# EAGLE board board (EAGLE 9.7.0)
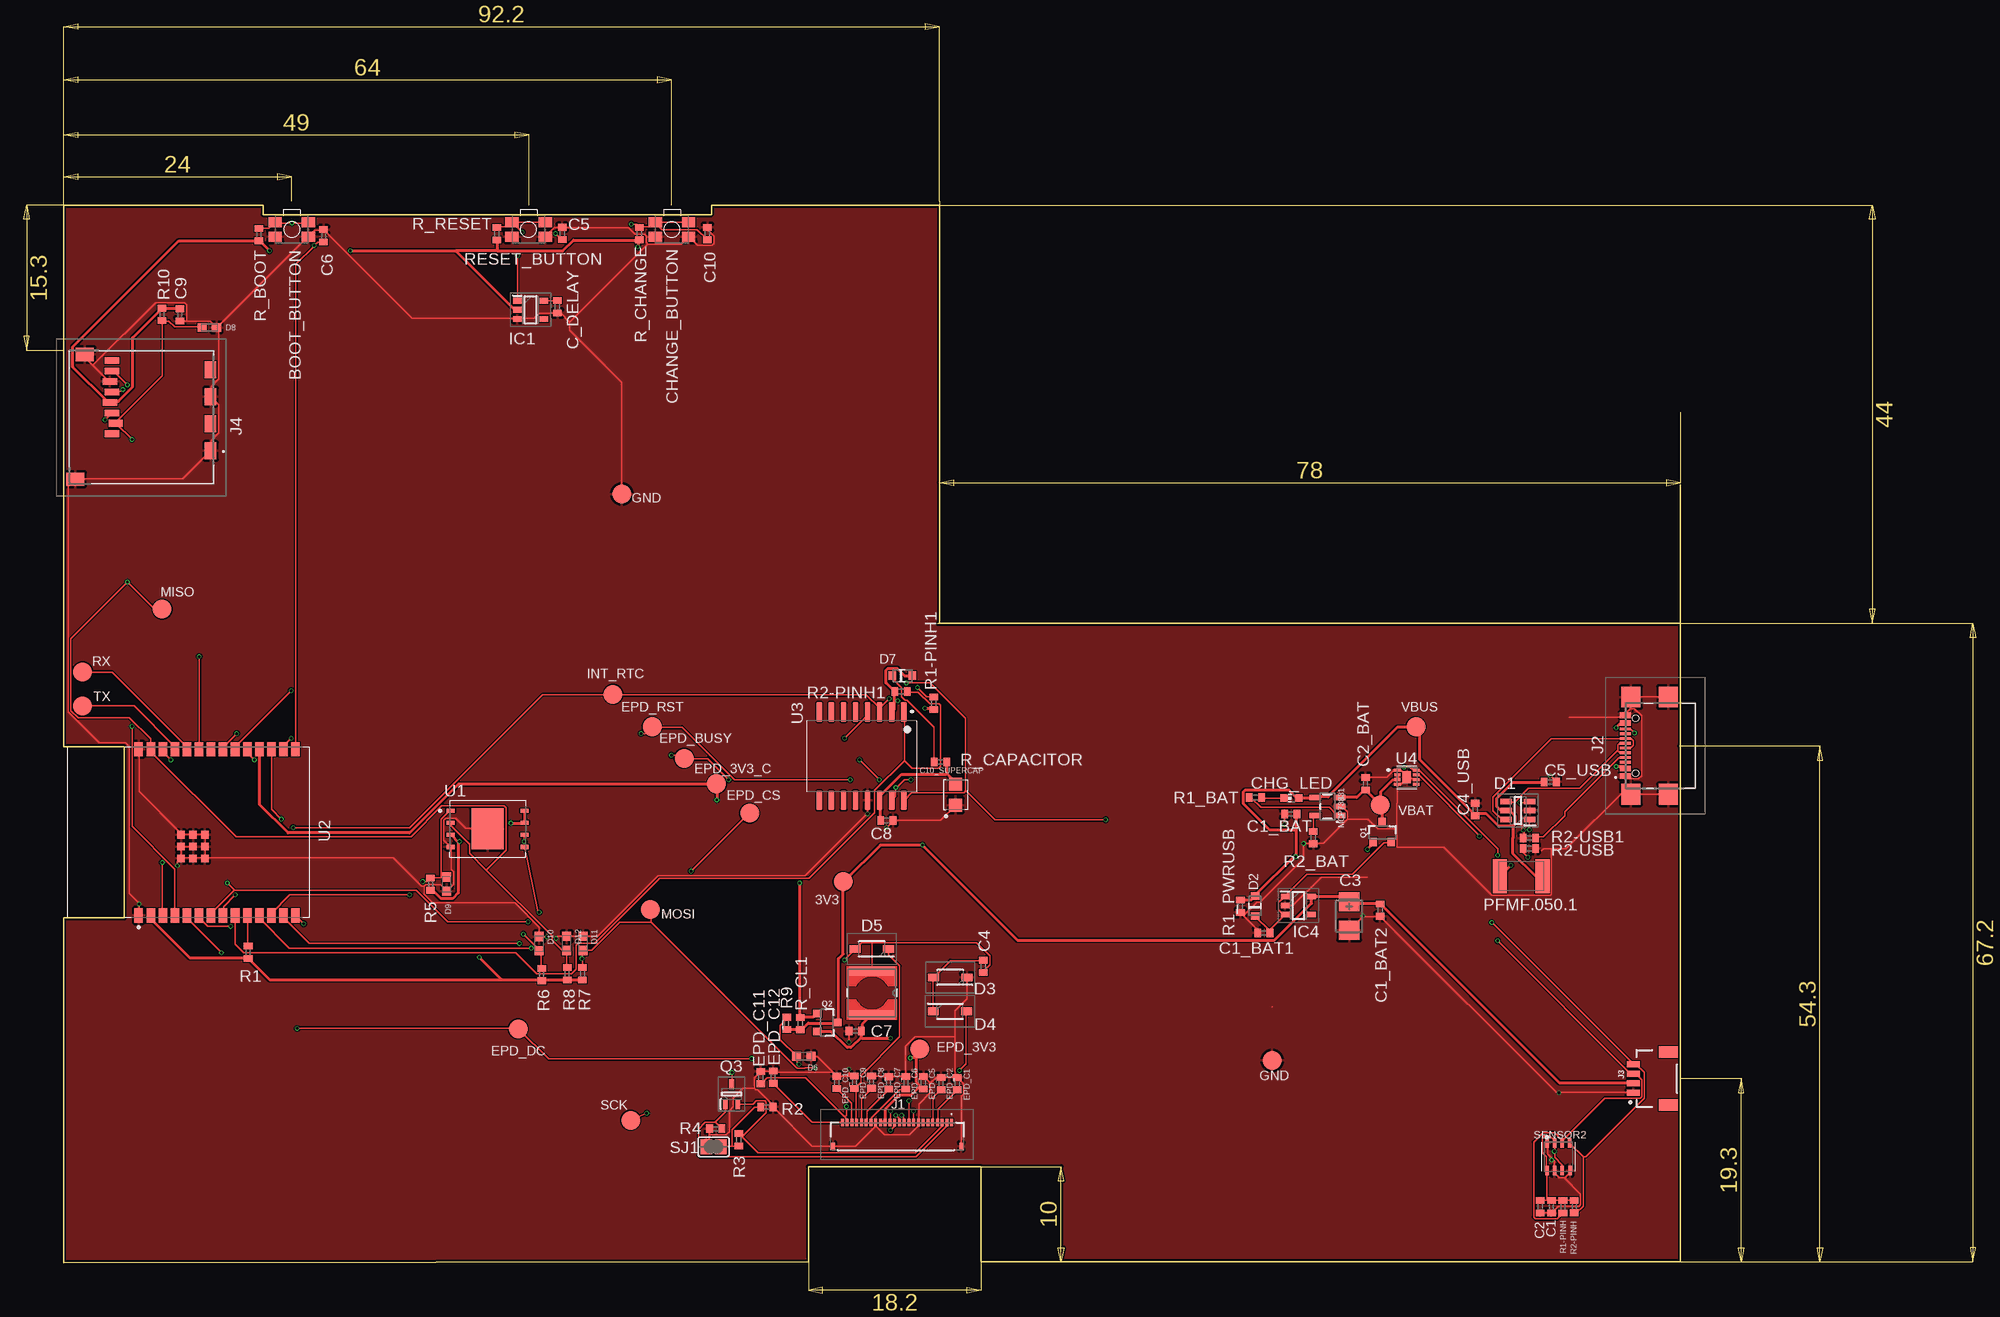
[diagram p0: board, top side]
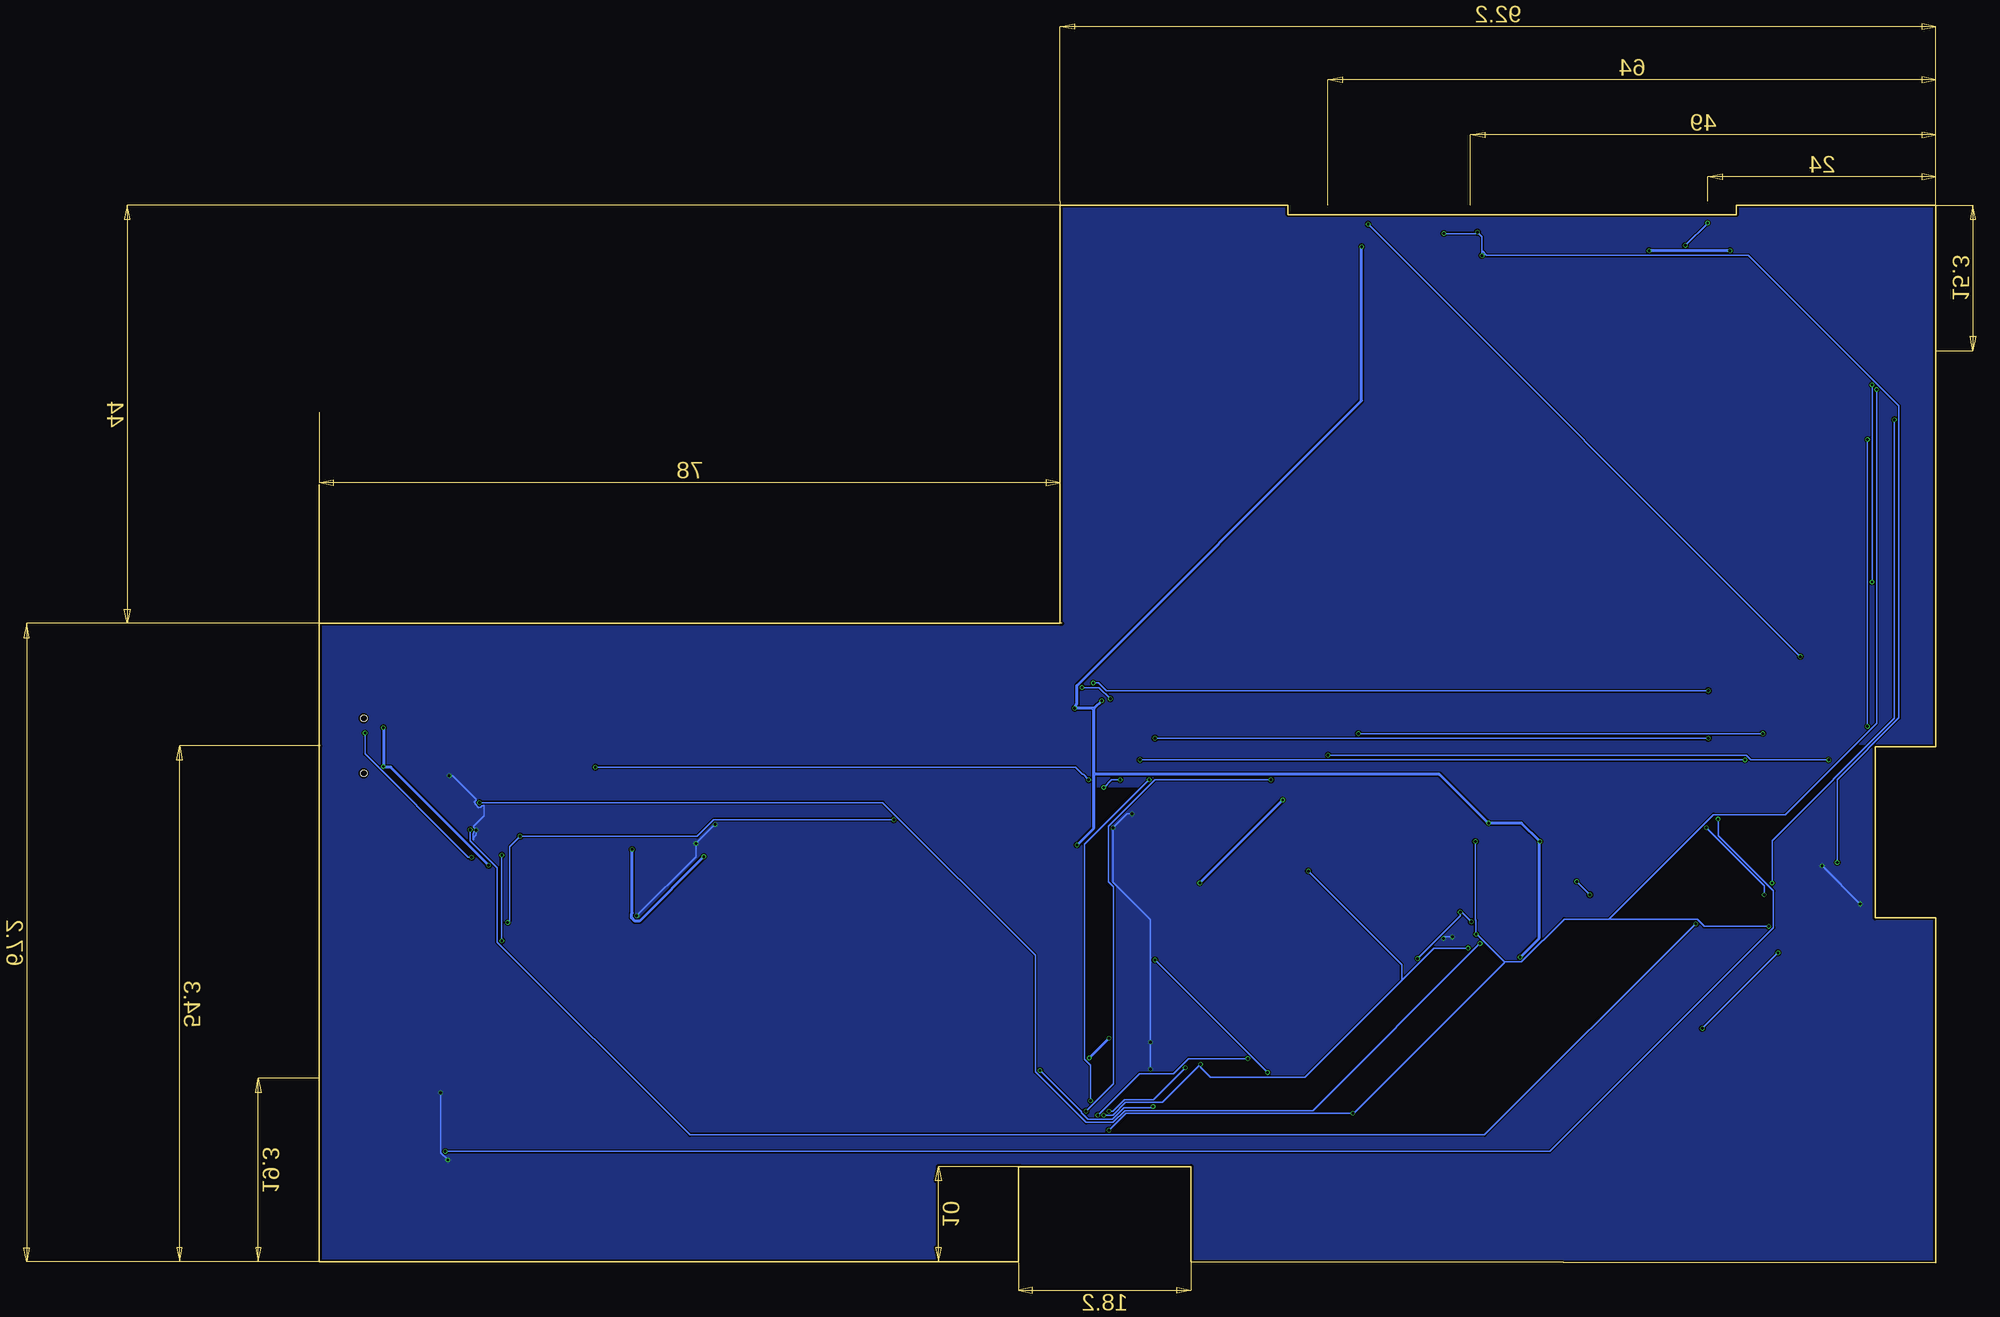
[diagram p1: board, bottom side, seen from below]

Size 170.2 x 111.3 mm. Coordinates in mm from the lower left corner, seen from the top.
Outline: 170.2,81.9 170.2,67.3
Outline: 170.2,67.3 92.2,67.3 92.2,111.3 68.2,111.3 68.2,110.3 21,110.3 21,111.3 0,111.3 0,54.3 6.4,54.3 6.4,36.3 0,36.3 0,0 78.4,0.1 78.4,10.1 96.6,10.1 96.6,0.1 170.2,0.1 170.2,67.3
Copper layers (1*16): Top 0.035mm / dielectric 1.6mm / Bottom 0.035mm
Design rules "jlcpcb-2layers.dru *": minimum track width 0.15mm, minimum drill 0.3mm, track to track 5mil, track to pad 5mil, pad to pad 5mil, via to via 5mil, smd to smd 5mil, copper to edge 0.2mm, drill to drill 6mil, minimum pad ring 10mil, minimum via ring 3mil, stop-mask expansion 4mil, vias tented up to drill 0mil, thermal gap 10mil
Net classes: 1 signals: width 0.3 mm

## Footprints (pad centres in the part's own frame; a part is rotated, then mirrored left to right if it is on the bottom)
MYBUTTON = smd 1.4 x 1.05: 1 1.75,0.75; 2 -1.75,0.75; 3 -1.75,-0.75; 4 1.75,-0.75
ESP32_WROVER_EAGLE-LTSPICE_C0402 = smd 0.7 x 0.9: 1 -0.65,0; 2 0.65,0
RCL_CT3528 = smd 2 x 2.2: + -1.5,0; - 1.5,0
CAPCP3225X100N = smd 1.4 x 1.4: 1 -1.1,0; 2 1.1,0
ADAFRUIT_CHIP-LED0603 = smd 0.8 x 0.8: A 0,-0.75; C 0,0.75
SOT95P280X145-6N = smd 1.2 x 0.6: 1 -1.25,0.95; 2 -1.25,0; 3 -1.25,-0.95; 4 1.25,-0.95; 5 1.25,0; 6 1.25,0.95
ESP32_WROVER_AVX---SD0805S020S1R0_AVX_SD0805S020S1R0_0 = smd 0.8 x 0.9: 1 -1.05,0; 2 1.05,0
SOD3716X135N = smd 1.15 x 0.8: 1 -1.75,0; 2 1.75,0
DIOC1608X36N = smd 0.97 x 0.94: 1 -0.75,0; 2 0.75,0
SOT95P280X125-5N = smd 0.9 x 0.6: 1 -1.4,0.95; 2 -1.4,0; 3 -1.4,-0.95; 4 1.4,-0.95; 5 1.4,0.95
SOT95P280X120-5N = smd 0.9 x 0.6: 1 -1.4,0.95; 2 -1.4,0; 3 -1.4,-0.95; 4 1.4,-0.95; 5 1.4,0.95
FH34SRJ24S05SH99 = smd 0.3 x 0.8: 1 5.75,1.45; 2 5.25,1.45; 3 4.75,1.45; 4 4.25,1.45; 5 3.75,1.45; 6 3.25,1.45; 7 2.75,1.45; 8 2.25,1.45; 9 1.75,1.45; 10 1.25,1.45; 11 0.75,1.45; 12 0.25,1.45; 13 -0.25,1.45; 14 -0.75,1.45; 15 -1.25,1.45; 16 -1.75,1.45; 17 -2.25,1.45; 18 -2.75,1.45; 19 -3.25,1.45; 20 -3.75,1.45; 21 -4.25,1.45; 22 -4.75,1.45; 23 -5.25,1.45; 24 -5.75,1.45 | smd 0.4 x 0.8: MP1 6.75,-1.05; MP2 -6.75,-1.05
SAMACSYS_PARTS_USB4110GFA = smd 0.3 x 1.15: A1 -3.35,3.678; A4 -2.55,3.678; A5 -1.25,3.678; A6 -0.25,3.678; A7 0.25,3.678; A8 1.25,3.678; A9 2.55,3.678; A12 3.35,3.678; B1 3.05,3.678; B4 2.25,3.678; B5 1.75,3.678; B6 0.75,3.678; B7 -0.75,3.678; B8 -1.75,3.678; B9 -2.25,3.678; B12 -3.05,3.678 | smd 2.18 x 2: MP1 -5.11,-0.827; MP2 5.11,-0.827; MP3 -5.11,3.103; MP4 5.11,3.103 | hole 0.65: -2.89,2.603; 2.89,2.603
JST04_1MM_RA = smd 0.6 x 1.35: 1 -1.5,0; 2 -0.5,0; 3 0.5,0; 4 1.5,0 | smd 1.2 x 2: NC1 2.8,-3.675; NC2 -2.8,-3.675
112ATAARR03ATTEND = smd 1.8 x 1.2: G1 10.6,10.4; G2 4.9,10.4; S1 7.75,10.4; S2 2.05,10.4 | smd 1.4 x 1.9: G3 13.6,-3.85; G4 0.45,-2.85 | smd 0.7 x 1.5: P1 8.8,0; P2 7.7,0.4; P3 6.6,0; P4 5.5,-0.2; P5 4.4,0; P6 3.3,-0.2; P7 2.2,0; P8 1.1,0
IND_4828-WE-TPC_WRE = smd 0.958 x 4.84: 1 -2.286,0; 2 2.286,0
ESP32_WROVER_SPARKFUN-IC-POWER_SOT23-5 = smd 0.55 x 1.2: 1 -0.95,-1.3; 2 0,-1.3; 3 0.95,-1.3; 4 0.95,1.3; 5 -0.95,1.3
ESP32C6_VARISTOR_CT/CN1812 = smd 1.5 x 3.6: 1 -2.25,0; 2 2.25,0
ESP32_WROVER_SPARKFUN-DISCRETESEMI_SOT23-3 = smd 0.8 x 0.9: 1 -0.95,-1; 2 0.95,-1; 3 0,1.1
SOT65P210X110-3N = smd 1.05 x 0.5: 1 -1.05,0.65; 2 -1.05,-0.65; 3 1.05,0
ESP32_WROVER_EAGLE-LTSPICE_R0402 = smd 0.7 x 0.9: 1 -0.65,0; 2 0.65,0
ESP32_WROVER_BME680_PSON80P300X300X100-8N = smd 1.016 x 0.5: 1 1.458,1.2; 2 1.458,0.4; 3 1.458,-0.4; 4 1.458,-1.2; 5 -1.458,-1.22; 6 -1.458,-0.4; 7 -1.458,0.4; 8 -1.458,1.2
SJ = smd 1.168 x 1.6: 1 -0.762,0; 2 0.762,0
TP20R = smd 2 x 2: TP 0,0
SON127P600X800X80-9N = smd 0.94 x 0.44: 1 -3.895,1.905; 2 -3.895,0.635; 3 -3.895,-0.635; 4 -3.895,-1.905; 5 3.895,-1.905; 6 3.895,-0.635; 7 3.895,0.635; 8 3.895,1.905 | smd 3.4 x 4.3: 9 0,0
XCVR_ESP32-C6-WROOM-1-N8 = smd 1.5 x 0.9: 1 -8.75,5.26; 2 -8.75,3.99; 3 -8.75,2.72; 4 -8.75,1.45; 5 -8.75,0.18; 6 -8.75,-1.09; 7 -8.75,-2.36; 8 -8.75,-3.63; 9 -8.75,-4.9; 10 -8.75,-6.17; 11 -8.75,-7.44; 12 -8.75,-8.71; 13 -8.75,-9.98; 14 -8.75,-11.25; 15 8.75,-11.25; 16 8.75,-9.98; 17 8.75,-8.71; 18 8.75,-7.44; 19 8.75,-6.17; 20 8.75,-4.9; 21 8.75,-3.63; 22 8.75,-2.36; 23 8.75,-1.09; 24 8.75,0.18; 25 8.75,1.45; 26 8.75,2.72; 27 8.75,3.99; 28 8.75,5.26 | smd 0.8 x 0.8: 29_1 -2.755,0.79; 29_2 -1.505,0.79; 29_3 -0.255,0.79; 29_4 -2.755,-0.46; 29_5 -1.505,-0.46; 29_6 -0.255,-0.46; 29_7 -2.755,-1.71; 29_8 -1.505,-1.71; 29_9 -0.255,-1.71
SOIC127P1032X265-16N = smd 2.05 x 0.59: 1 -4.655,4.445; 2 -4.655,3.175; 3 -4.655,1.905; 4 -4.655,0.635; 5 -4.655,-0.635; 6 -4.655,-1.905; 7 -4.655,-3.175; 8 -4.655,-4.445; 9 4.655,-4.445; 10 4.655,-3.175; 11 4.655,-1.905; 12 4.655,-0.635; 13 4.655,0.635; 14 4.655,1.905; 15 4.655,3.175; 16 4.655,4.445
SON50P200X200X80-9N = smd 0.76 x 0.27: 1 -0.985,0.75; 4 -0.985,-0.75; 5 0.985,-0.75; 6 0.985,-0.25; 7 0.985,0.25; 8 0.985,0.75 | smd 0.76 x 0.321: 2 -0.985,0.25; 3 -0.985,-0.25 | smd 0.9 x 1.3: 9 0,0

## Placement (x,y rotation side)
BOOT_BUTTON  BUTTON_CUSYOMV1  [MYBUTTON]  24.01,108.75 180 top
C1  100nF  [ESP32_WROVER_EAGLE-LTSPICE_C0402]  156.63,5.88 270 top
C1_BAT  4.7uF  [ESP32_WROVER_EAGLE-LTSPICE_C0402]  129.19,47.25 180 top
C1_BAT1  4.7uF  [ESP32_WROVER_EAGLE-LTSPICE_C0402]  126.35,34.71 180 top
C1_BAT2  4.7uF  [ESP32_WROVER_EAGLE-LTSPICE_C0402]  138.59,37.11 270 top
C2  100nF  [ESP32_WROVER_EAGLE-LTSPICE_C0402]  155.43,5.9 270 top
C2_BAT  4.7uF  [ESP32_WROVER_EAGLE-LTSPICE_C0402]  137.05,50.42 90 top
C3  100uF TANT  [RCL_CT3528]  135.34,36.49 270 top
C4  4.7uF/25V  [ESP32_WROVER_EAGLE-LTSPICE_C0402]  96.81,31.18 270 top
C4_USB  100nF  [ESP32_WROVER_EAGLE-LTSPICE_C0402]  148.6,47.7 90 top
C5  1uF  [ESP32_WROVER_EAGLE-LTSPICE_C0402]  52.49,108.33 90 top
C5_USB  100nF  [ESP32_WROVER_EAGLE-LTSPICE_C0402]  156.5,50.6 0 top
C6  100nF  [ESP32_WROVER_EAGLE-LTSPICE_C0402]  27.37,108.08 90 top
C7  10uF  [ESP32_WROVER_EAGLE-LTSPICE_C0402]  83.33,24.37 180 top
C8  100nF  [ESP32_WROVER_EAGLE-LTSPICE_C0402]  86.66,46.53 0 top
C9  100nF  [ESP32_WROVER_EAGLE-LTSPICE_C0402]  12.23,99.76 270 top
C10  100nF  [ESP32_WROVER_EAGLE-LTSPICE_C0402]  67.77,108.32 90 top
C10_SUPERCAP  CPH3225A  [CAPCP3225X100N]  93.89,49.25 90 top
C_DELAY  100nF  [ESP32_WROVER_EAGLE-LTSPICE_C0402]  51.99,100.61 270 top
CHANGE_BUTTON  BUTTON_CUSYOMV1  [MYBUTTON]  64.04,108.75 180 top
CHG_LED  [ADAFRUIT_CHIP-LED0603]  129.25,48.89 90 top
D1  USBLC6-2SC6Y  [SOT95P280X145-6N]  153.1,47.6 180 top
D2  ESP32_WROVER_AVX---SD0805S020S1R0_AVX_SD0805S020S1R0_0_0AVX_SD0805S020S1R0_0_0  [ESP32_WROVER_AVX---SD0805S020S1R0_AVX_SD0805S020S1R0_0]  125.42,37.55 90 top
D3  MBR0530  [SOD3716X135N]  93.34,30.03 180 top
D4  MBR0530  [SOD3716X135N]  93.3,26.47 0 top
D5  MBR0530  [SOD3716X135N]  85.08,33.02 180 top
D6  PGB1010603MR  [DIOC1608X36N]  77.92,21.73 180 top
D7  ESP32_WROVER_AVX---SD0805S020S1R0_AVX_SD0805S020S1R0_0_0AVX_SD0805S020S1R0_0_0  [ESP32_WROVER_AVX---SD0805S020S1R0_AVX_SD0805S020S1R0_0]  88.3,61.78 0 top
D8  PGB1010603MR  [DIOC1608X36N]  15.34,98.43 180 top
D9  PGB1010603MR  [DIOC1608X36N]  40.33,39.84 90 top
D10  PGB1010603MR  [DIOC1608X36N]  50.07,33.58 270 top
D11  PGB1010603MR  [DIOC1608X36N]  54.67,33.6 270 top
D12  PGB1010603MR  [DIOC1608X36N]  52.97,33.62 270 top
EPD_C1  1uF/50V  [ESP32_WROVER_EAGLE-LTSPICE_C0402]  94.07,18.86 270 top
EPD_C2  1uF/50V  [ESP32_WROVER_EAGLE-LTSPICE_C0402]  92.37,18.85 270 top
EPD_C5  0.1uF/50V  [ESP32_WROVER_EAGLE-LTSPICE_C0402]  90.51,18.94 270 top
EPD_C6  1uF/50V  [ESP32_WROVER_EAGLE-LTSPICE_C0402]  88.67,18.94 270 top
EPD_C7  1uF/50V  [ESP32_WROVER_EAGLE-LTSPICE_C0402]  86.85,18.92 270 top
EPD_C8  1uF/50V  [ESP32_WROVER_EAGLE-LTSPICE_C0402]  85.05,19.01 270 top
EPD_C9  1uF/50V  [ESP32_WROVER_EAGLE-LTSPICE_C0402]  83.25,19 270 top
EPD_C10  1uF/50V  [ESP32_WROVER_EAGLE-LTSPICE_C0402]  81.39,18.97 270 top
EPD_C11  1uF/50V  [ESP32_WROVER_EAGLE-LTSPICE_C0402]  73.39,19.49 270 top
EPD_C12  1uF/50V  [ESP32_WROVER_EAGLE-LTSPICE_C0402]  74.69,19.53 270 top
IC1  BD5229G-TR  [SOT95P280X125-5N]  49.15,100.29 0 top
IC4  XC6220A331MR-G  [SOT95P280X120-5N]  129.99,37.59 0 top
J1  FH34SRJ-24S-0.5SH_99_  [FH34SRJ24S05SH99]  87.74,13.29 0 top
J2  [SAMACSYS_PARTS_USB4110GFA]  168.1,54.42 90 top
J3  QWIIC_RIGHT_ANGLE  [JST04_1MM_RA]  165.25,19.38 90 top
J4  112A-TAAR-R03_ATTEND  [112ATAARR03ATTEND]  5.08,96.05 270 top
L1  744043680IND_4828-WE-TPC_WRE  [IND_4828-WE-TPC_WRE]  85.1,28.4 270 top
MCP73831  ESP32_WROVER_SPARKFUN-IC-POWER_MCP73831  [ESP32_WROVER_SPARKFUN-IC-POWER_SOT23-5]  133.04,48.01 90 top
PFMF.050.1  [ESP32C6_VARISTOR_CT/CN1812]  153.44,40.69 0 top
Q1  20V/4.2A/52mΩ/1.4W  [ESP32_WROVER_SPARKFUN-DISCRETESEMI_SOT23-3]  138.81,45.26 0 top
Q2  20V/4.2A/52mΩ/1.4W  [ESP32_WROVER_SPARKFUN-DISCRETESEMI_SOT23-3]  80.36,25.27 270 top
Q3  SI1308EDL-T1-GE3  [SOT65P210X110-3N]  70.32,17.75 90 top
R1  10K  [ESP32_WROVER_EAGLE-LTSPICE_R0402]  19.43,32.67 270 top
R1-PINH  10K  [ESP32_WROVER_EAGLE-LTSPICE_R0402]  157.83,5.9 90 top
R1-PINH1  10K  [ESP32_WROVER_EAGLE-LTSPICE_R0402]  91.59,58.89 270 top
R1_BAT  200  [ESP32_WROVER_EAGLE-LTSPICE_R0402]  125.47,48.95 180 top
R1_PWRUSB  100K  [ESP32_WROVER_EAGLE-LTSPICE_R0402]  123.89,37.51 90 top
R2  2.2  [ESP32_WROVER_EAGLE-LTSPICE_R0402]  74.03,16.39 180 top
R2-PINH  10K  [ESP32_WROVER_EAGLE-LTSPICE_R0402]  159.03,5.91 90 top
R2-PINH1  10K  [ESP32_WROVER_EAGLE-LTSPICE_R0402]  88.15,60.11 180 top
R2-USB  5k1  [ESP32_WROVER_EAGLE-LTSPICE_R0402]  154.3,43.6 0 top
R2-USB1  5k1  [ESP32_WROVER_EAGLE-LTSPICE_R0402]  154.3,44.7 0 top
R2_BAT  2K  [ESP32_WROVER_EAGLE-LTSPICE_R0402]  131.55,44.74 90 top
R3  0.47  [ESP32_WROVER_EAGLE-LTSPICE_R0402]  71.07,12.94 90 top
R4  10k  [ESP32_WROVER_EAGLE-LTSPICE_R0402]  68.65,14.11 0 top
R5  10K  [ESP32_WROVER_EAGLE-LTSPICE_R0402]  38.63,39.85 270 top
R6  10K  [ESP32_WROVER_EAGLE-LTSPICE_R0402]  50.33,30.33 270 top
R7  10K  [ESP32_WROVER_EAGLE-LTSPICE_R0402]  54.63,30.41 270 top
R8  10K  [ESP32_WROVER_EAGLE-LTSPICE_R0402]  53.01,30.41 270 top
R9  10K  [ESP32_WROVER_EAGLE-LTSPICE_R0402]  76.11,25.19 270 top
R10  10K  [ESP32_WROVER_EAGLE-LTSPICE_R0402]  10.37,99.81 90 top
R_BOOT  10K  [ESP32_WROVER_EAGLE-LTSPICE_R0402]  20.57,108.21 270 top
R_CAPACITOR  15  [ESP32_WROVER_EAGLE-LTSPICE_R0402]  92.31,52.71 0 top
R_CHANGE  10K  [ESP32_WROVER_EAGLE-LTSPICE_R0402]  60.61,108.32 270 top
R_CL1  10K  [ESP32_WROVER_EAGLE-LTSPICE_R0402]  77.55,25.17 270 top
R_RESET  10K  [ESP32_WROVER_EAGLE-LTSPICE_R0402]  45.61,108.3 270 top
RESET_BUTTON  BUTTON_CUSYOMV1  [MYBUTTON]  48.95,108.75 180 top
SENSOR2  ESP32_WROVER_BME680_BME680  [ESP32_WROVER_BME680_PSON80P300X300X100-8N]  157.36,11.15 90 top
SJ1  [SJ]  68.42,12.19 0 top
TP1  TPTP20R  [TP20R]  1.99,58.61 0 top
TP2  TPTP20R  [TP20R]  1.99,62.19 0 top
TP3  TPTP20R  [TP20R]  138.61,48.19 0 top
TP4  TPTP20R  [TP20R]  127.23,21.29 0 top
TP5  TPTP20R  [TP20R]  58.75,80.89 0 top
TP6  TPTP20R  [TP20R]  10.37,68.79 0 top
TP7  TPTP20R  [TP20R]  61.79,37.19 0 top
TP8  TPTP20R  [TP20R]  59.71,14.99 0 top
TP9  TPTP20R  [TP20R]  65.33,53.09 0 top
TP10  TPTP20R  [TP20R]  72.22,47.31 0 top
TP11  TPTP20R  [TP20R]  47.87,24.61 0 top
TP12  TPTP20R  [TP20R]  61.97,56.41 0 top
TP13  TPTP20R  [TP20R]  68.72,50.41 0 top
TP14  TPTP20R  [TP20R]  142.37,56.41 0 top
TP15  TPTP20R  [TP20R]  57.82,59.81 0 top
TP16  TPTP20R  [TP20R]  82.07,40.11 0 top
TP17  TPTP20R  [TP20R]  90.12,22.51 0 top
U1  W25Q512JVEIQ  [SON127P600X800X80-9N]  44.64,45.66 0 top
U2  ESP32-C6-WROOM-1-N8  [XCVR_ESP32-C6-WROOM-1-N8]  13.16,45.3 90 top
U3  DS3231SN#  [SOIC127P1032X265-16N]  84,53.31 270 top
U4  MAX17048G+T10  [SON50P200X200X80-9N]  141.4,51.1 0 top

## Library data of the parts
BOOT_BUTTON CHANGE_BUTTON CHG_LED PFMF.050.1 RESET_BUTTON SJ1 TP1-TP17 = DeskAssistant v19 v1
C1 C1_BAT C1_BAT1 C1_BAT2 C2 C2_BAT C4 C4_USB C5 C5_USB C6-C10 C_DELAY EPD_C1 EPD_C2 EPD_C5-EPD_C12 = DeskAssistant v19 v1; SPICEMODEL: NONE; SPICEPREFIX: C
C3 = DeskAssistant v19 v1; SPICEPREFIX: C
C10_SUPERCAP = DeskAssistant v19 v1; AVAILABILITY: Not in stock; CHECK_PRICES: https://www.snapeda.com/parts/CPH3225A/Seiko+Instruments/view-part/?ref=eda; DESCRIPTION: 11 mF (EDLC) Supercapacitor 3.3 V 1210 (3225 Metric) - -; MF: Seiko Instruments; MP: CPH3225A; PACKAGE: 1210 Seiko; PRICE: None; PURCHASE-URL: https://www.snapeda.com/api/url_track_click_mouser/?unipart_id=562593&manufacturer=Seiko Instruments&part_name=CPH3225A&search_term=None; SNAPEDA_LINK: https://www.snapeda.com/parts/CPH3225A/Seiko+Instruments/view-part/?ref=snap
D1 = DeskAssistant v19 v1; AVAILABILITY: In Stock; CHECK_PRICES: https://www.snapeda.com/parts/USBLC6-2SC6Y/STMicroelectronics/view-part/?ref=eda; DESCRIPTION: 17V Clamp 5A (8/20µs) Ipp Tvs Diode Surface Mount SOT-23-6; MF: STMicroelectronics; MP: USBLC6-2SC6Y; PACKAGE: SOT-23-6 STMicroelectronics; PRICE: None; SNAPEDA_LINK: https://www.snapeda.com/parts/USBLC6-2SC6Y/STMicroelectronics/view-part/?ref=snap
D2 D7 = DeskAssistant v19 v1; CENTROID_NOT_SPECIFIED: No; DATASHEET: http://datasheets.avx.com/schottky.pdf; DIGIKEY_DESCRIPTION: DIODE SCHOTTKY 20V 1A 0805; DIGIKEY_PART_NUMBER: 478-7800-1-ND; LEAD_FREE: yes; MF: AVX; MOUSER_PART_NUMBER: 581-SD0805S020S1R0; PACKAGE: 0805 (2012 metric); PREFIX: D; ROHS: yes; TEMPERATURE_RANGE_HIGH: +125°C; TEMPERATURE_RANGE_LOW: -55°C
D3-D5 = DeskAssistant v19 v1; AVAILABILITY: In Stock; CHECK_PRICES: https://www.snapeda.com/parts/MBR0530/Onsemi/view-part/?ref=eda; DESCRIPTION: Diode Schottky 30 V 500mA Surface Mount SOD-123; MF: ON Semiconductor; MP: MBR0530; PACKAGE: SOD-123-2 ON Semiconductor; PRICE: None; PURCHASE-URL: https://www.snapeda.com/api/url_track_click_mouser/?unipart_id=179458&manufacturer=ON Semiconductor&part_name=MBR0530&search_term=None; SNAPEDA_LINK: https://www.snapeda.com/parts/MBR0530/Onsemi/view-part/?ref=snap
D6 D8-D12 = DeskAssistant v19 v1; AVAILABILITY: In Stock; CHECK_PRICES: https://www.snapeda.com/parts/PGB1010603MR/Littelfuse/view-part/?ref=eda; DESCRIPTION: 150V (Typ) Clamp - Ipp Tvs Diode Surface Mount 0603 (1608 Metric); MF: Littelfuse Inc.; MP: PGB1010603MR; PACKAGE: 0603 Littelfuse Inc.; PRICE: None; PURCHASE-URL: https://www.snapeda.com/api/url_track_click_mouser/?unipart_id=5659453&manufacturer=Littelfuse Inc.&part_name=PGB1010603MR&search_term=None; SNAPEDA_LINK: https://www.snapeda.com/parts/PGB1010603MR/Littelfuse/view-part/?ref=snap
IC1 = DeskAssistant v19 v1; DESCRIPTION: Voltage Detector with Adjustable Delay Time: CMOS processes are utilized to develop high precision, low current consumption CMOS reset ICs that allow arbitrary setting of the delay time. The extensive lineup includes both Nch Open Drain and CMOS output types in a wide range of detection voltages (from 2.3V to 6.0V, in 0.1V steps), enabling selection of the ideal solution based on customer requirements. In addition, the entire series is of course both lead-free and RoHS-compliant.; HEIGHT: 1.25mm; MANUFACTURER_NAME: ROHM Semiconductor; MANUFACTURER_PART_NUMBER: BD5229G-TR; MOUSER_PART_NUMBER: 755-BD5229G-TR; MOUSER_PRICE-STOCK: https://www.mouser.co.uk/ProductDetail/ROHM-Semiconductor/BD5229G-TR?qs=4kLU8WoGk0vvnhrrYwdszw%3D%3D
IC4 = DeskAssistant v19 v1; DESCRIPTION: LDO Voltage Regulators; HEIGHT: 1.2mm; MANUFACTURER_NAME: Torex; MANUFACTURER_PART_NUMBER: XC6220A331MR-G; MOUSER_PART_NUMBER: 865-XC6220A331MR-G; MOUSER_PRICE-STOCK: https://www.mouser.co.uk/ProductDetail/Torex-Semiconductor/XC6220A331MR-G?qs=AsjdqWjXhJ8ZSWznL1J0gg%3D%3D
J1 = DeskAssistant v19 v1; DESCRIPTION: 24 Position FFC, FPC Connector Contacts, Top and Bottom 0.020" (0.50mm) Surface Mount, Right Angle; HEIGHT: 1.1mm; MANUFACTURER_NAME: Hirose; MANUFACTURER_PART_NUMBER: FH34SRJ-24S-0.5SH(99); MOUSER_PART_NUMBER: 798-FH34SRJ24S05SH99; MOUSER_PRICE-STOCK: https://www.mouser.co.uk/ProductDetail/Hirose-Connector/FH34SRJ-24S-0.5SH99?qs=vcbW%252B4%252BSTIpKBl5ap9J8Fw%3D%3D
J2 = DeskAssistant v19 v1; DESCRIPTION: CONN USB 2.0 TYPE-C R/A SMT; HEIGHT: 3.26mm; MANUFACTURER_NAME: GCT (GLOBAL CONNECTOR TECHNOLOGY); MANUFACTURER_PART_NUMBER: USB4110-GF-A; MOUSER_PART_NUMBER: 640-USB4110-GF-A; MOUSER_PRICE-STOCK: https://www.mouser.co.uk/ProductDetail/GCT/USB4110-GF-A?qs=KUoIvG%2F9IlYiZvIXQjyJeA%3D%3D
J3 = DeskAssistant v19 v1; PROD_ID: CONN-13694
J4 = DeskAssistant v19 v1; DESCRIPTION: Micro SD Card Socket, Push-Push Type, Top Mount, SMT, H=1.83mm, 10u; HEIGHT: 1.9mm; MANUFACTURER_NAME: ATTEND; MANUFACTURER_PART_NUMBER: 112A-TAAR-R03 ATTEND
L1 = DeskAssistant v19 v1; COPYRIGHT: Copyright (C) 2024 Ultra Librarian. All rights reserved.; MANUFACTURER_PART_NUMBER: 744043680; MFR_NAME: Wurth Electronics; VALUE_V: 68uH
MCP73831 = DeskAssistant v19 v1; PROD_ID: IC-09995
Q1 Q2 = DeskAssistant v19 v1; PROD_ID: TRAN-14388
Q3 = DeskAssistant v19 v1; AVAILABILITY: In Stock; CHECK_PRICES: https://www.snapeda.com/parts/SI1308EDL-T1-GE3/Vishay+Siliconix/view-part/?ref=eda; DESCRIPTION: Si1308EDL-T1-GE3 N-channel MOSFET Transistor, 1.5 A, 30 V, 3-Pin SC-70 | Siliconix / Vishay SI1308EDL-T1-GE3; MF: Vishay Siliconix; MP: SI1308EDL-T1-GE3; PACKAGE: SOT-323 Vishay Semiconductor; PRICE: None; PURCHASE-URL: https://www.snapeda.com/api/url_track_click_mouser/?unipart_id=274603&manufacturer=Vishay Siliconix&part_name=SI1308EDL-T1-GE3&search_term=None; SNAPEDA_LINK: https://www.snapeda.com/parts/SI1308EDL-T1-GE3/Vishay+Siliconix/view-part/?ref=snap
R1 R1-PINH R1-PINH1 R1_BAT R2 R2-PINH R2-PINH1 R2-USB R2-USB1 R2_BAT R3-R10 R_BOOT R_CAPACITOR R_CHANGE R_CL1 R_RESET = DeskAssistant v19 v1; SPICEMODEL: NONE; SPICEPREFIX: R
R1_PWRUSB = DeskAssistant v19 v1; SPICEPREFIX: R
SENSOR2 = DeskAssistant v19 v1; AVAILABILITY: Unavailable; DESCRIPTION: Integrated Environmental Unit; MF: Bosch Sensortec; MP: BME680; PACKAGE: LGA-8 Bosch Tools; PRICE: None
U1 = DeskAssistant v19 v1; AVAILABILITY: In Stock; CHECK_PRICES: https://www.snapeda.com/parts/W25Q512JVEIQ/Winbond+Electronics/view-part/?ref=eda; DESCRIPTION: FLASH - NOR Memory IC 512Mb (64M x 8) SPI - Quad I/O 133 MHz 8-WSON (8x6); MF: Winbond Electronics; MP: W25Q512JVEIQ; PACKAGE: Package; PRICE: None; SNAPEDA_LINK: https://www.snapeda.com/parts/W25Q512JVEIQ/Winbond+Electronics/view-part/?ref=snap
U2 = DeskAssistant v19 v1; AVAILABILITY: In Stock; CHECK_PRICES: https://www.snapeda.com/parts/ESP32-C6-WROOM-1-N8/Espressif+Systems/view-part/?ref=eda; DESCRIPTION: Multiprotocol Modules ESP32-C6 module, Wi-Fi 6 in 2.4 GHz band, Bluetooth 5, Zigbee 3.0 and Thread. ESP34-WROOM Compatible - ENGINEERING SAMPLE; MF: Espressif Systems; MP: ESP32-C6-WROOM-1-N8; PACKAGE: None; PRICE: None; SNAPEDA_LINK: https://www.snapeda.com/parts/ESP32-C6-WROOM-1-N8/Espressif+Systems/view-part/?ref=snap
U3 = DeskAssistant v19 v1; AVAILABILITY: In Stock; CHECK_PRICES: https://www.snapeda.com/parts/DS3231SN%23/Analog+Devices/view-part/?ref=eda; DESCRIPTION: Extremely Accurate I²C-Integrated RTC/TCXO/Crystal; MF: Analog Devices; MP: DS3231SN#; PACKAGE: SOIC-16 Maxim; PRICE: None; PURCHASE-URL: https://www.snapeda.com/api/url_track_click_mouser/?unipart_id=99048&manufacturer=Analog Devices&part_name=DS3231SN#&search_term=None; SNAPEDA_LINK: https://www.snapeda.com/parts/DS3231SN%23/Analog+Devices/view-part/?ref=snap
U4 = DeskAssistant v19 v1; AVAILABILITY: In Stock; CHECK_PRICES: https://www.snapeda.com/parts/MAX17048G+T10/Analog+Devices/view-part/?ref=eda; DESCRIPTION: 3µA 1-Cell/2-Cell Fuel Gauge with ModelGauge; MF: Analog Devices; MP: MAX17048G+T10; PACKAGE: TDFN-8 Maxim; PRICE: None; PURCHASE-URL: https://www.snapeda.com/api/url_track_click_mouser/?unipart_id=329239&manufacturer=Analog Devices&part_name=MAX17048G+T10&search_term=None; SNAPEDA_LINK: https://www.snapeda.com/parts/MAX17048G+T10/Analog+Devices/view-part/?ref=snap

## Nets
3V3 [signals]: C1_BAT2.1 C3.+ C9.1 D7.2 IC1.2 IC4.5 J3.2 J4.P4 Q2.3 R1-PINH1.2 R1.2 R2-PINH1.2 R5.2 R6.2 R7.2 R8.2 R9.2 R10.2 R_BOOT.2 R_CHANGE.2 R_CL1.2 R_RESET.2 TP16.TP U1.3 U1.7 U1.8 U2.2 U3.2
32KHZ: R2-PINH1.1 U2.9 U3.1
DN: D1.4 J2.A7 J2.B7
DP: D1.6 J2.A6 J2.B6
EPD_3V3 [signals]: C7.1 EPD_C5.2 J1.15 J1.16 L1.2 Q2.2 TP17.TP
EPD_3V3_C [signals]: Q2.1 R_CL1.1 TP13.TP U2.18
EPD_BUSY: J1.9 TP9.TP U2.26
EPD_CS: D6.2 J1.12 R9.1 TP10.TP U2.11
EPD_DC: J1.11 TP11.TP U2.5
EPD_RST: J1.10 TP12.TP U2.21
FLASH_CS: D9.2 R5.1 U1.1 U2.12
GDR: J1.2 Q3.1 R4.2
GND: BOOT_BUTTON.1 BOOT_BUTTON.2 C1.2 C1_BAT1.2 C1_BAT2.2 C1_BAT.2 C2.2 C2_BAT.2 C3.- C4_USB.2 C5.2 C5_USB.2 C6.2 C7.2 C8.2 C9.2 C10.2 C10_SUPERCAP.1 C_DELAY.2 CHANGE_BUTTON.1 CHANGE_BUTTON.2 D1.2 D3.1 D6.1 D8.1 D9.1 D10.1 D11.1 D12.1 EPD_C1.1 EPD_C2.1 EPD_C5.1 EPD_C6.1 EPD_C7.1 EPD_C8.1 EPD_C9.1 EPD_C10.1 EPD_C11.1 EPD_C12.1 IC1.3 IC4.2 J1.8 J1.17 J1.MP1 J1.MP2 J2.A1 J2.A12 J2.B1 J2.B12 J2.MP1 J2.MP2 J2.MP3 J2.MP4 J3.1 J4.G1 J4.G2 J4.G3 J4.G4 J4.P6 MCP73831.2 R1_PWRUSB.1 R2-USB1.1 R2-USB.2 R2.1 R2_BAT.1 R4.1 RESET_BUTTON.1 RESET_BUTTON.2 SENSOR2.1 SENSOR2.5 SENSOR2.7 SJ1.1 TP4.TP TP5.TP U1.4 U1.9 U2.1 U2.28 U2.29_1 U2.29_2 U2.29_3 U2.29_4 U2.29_5 U2.29_6 U2.29_7 U2.29_8 U2.29_9 U3.13 U4.1 U4.4 U4.6 U4.9
GPIO8: R1.1 U2.10
I2C_PW: C1.1 C2.1 R1-PINH.2 R2-PINH.2 SENSOR2.2 SENSOR2.6 SENSOR2.8 U2.17
INT_RTC: R1-PINH1.1 TP15.TP U2.8 U3.3
IO/BOOT: BOOT_BUTTON.3 BOOT_BUTTON.4 C6.1 R_BOOT.1 U2.15
IO/CHANGE: C10.1 CHANGE_BUTTON.3 CHANGE_BUTTON.4 R_CHANGE.1 U2.23
MISO: D12.2 J4.P7 R8.1 TP6.TP U1.2 U2.27
MOSI: D11.2 J1.14 J4.P3 R7.1 TP7.TP U1.5 U2.7
N$1: J2.A5 R2-USB1.2
N$4: J2.B5 R2-USB.1
N$6: C1_BAT1.1 D2.1 IC4.1 IC4.3 Q1.2
N$7: MCP73831.5 R2_BAT.2
N$8: EPD_C2.2 J1.5
N$9: EPD_C1.2 J1.4
N$10: CHG_LED.C R1_BAT.1
N$11: MCP73831.1 R1_BAT.2
N$12: EPD_C12.2 J1.24
N$13: C_DELAY.1 IC1.5
N$15: EPD_C10.2 J1.22
N$16: C4.1 D3.2 D4.1
N$18: EPD_C8.2 J1.20
N$19: EPD_C7.2 J1.19
N$20: EPD_C6.2 J1.18
N$25: D7.1 R_CAPACITOR.1
PREVGH: D5.1 EPD_C9.2 J1.21
PREVGL: D4.2 EPD_C11.2 J1.23
RESE: J1.3 Q3.2 R3.2
RESE': R2.2 R3.1 SJ1.2
RESET: C5.1 IC1.1 R_RESET.1 RESET_BUTTON.3 RESET_BUTTON.4 U2.3
RTC_RST: U2.16 U3.4
RX: TP2.TP U2.24
SCK: D10.2 J1.13 J4.P5 R6.1 TP8.TP U1.6 U2.6
SCL: J3.4 R2-PINH.1 SENSOR2.4 U2.20 U3.16 U4.7
SDA: J3.3 R1-PINH.1 SENSOR2.3 U2.19 U3.15 U4.8
SRC: C4.2 D5.2 L1.1 Q3.3
SS_SD: D8.2 J4.P2 R10.1 U2.4
TX: TP1.TP U2.25
USB_D+: D1.1 U2.14
USB_D-: D1.3 U2.13
VBAT [signals]: C2_BAT.1 MCP73831.3 Q1.3 TP3.TP U4.2 U4.3
VBUS [signals]: C1_BAT.1 C4_USB.1 C5_USB.1 CHG_LED.A D1.5 D2.2 MCP73831.4 PFMF.050.1.2 Q1.1 R1_PWRUSB.2 TP14.TP
VRTC [signals]: C8.1 C10_SUPERCAP.2 R_CAPACITOR.2 U3.14
VUSB [signals]: J2.A4 J2.A9 J2.B4 J2.B9 PFMF.050.1.1

## Tracks (layer width: path | path; a pad name or v marks a point on that pad's centre or on a via)
3V3  (via drill 0.3)
  Top 0.3: 41.29,106.5 41.27,106.52 v30.19,106.52 | 41.29,106.5 47.44,100.36 47.71,100.36 IC1.2 | 45.64,106.5 45.64,107.63 R_RESET.2 | 45.64,106.5 52.55,106.5 53.67,107.63 60.59,107.63 R_CHANGE.2 60.45,107.49 v60.45,106.93 | C9.1 12.19,100.42 10.39,100.42 R10.2 10.25,100.36 7.27,97.38 7.27,92.18 5.75,90.66 4.99,90.66 J4.P4 4.85,90.59 4.64,90.59 0.97,94.26 0.97,96.41 12.12,107.56 R_BOOT.2 20.71,107.49 v21.68,106.52 | J3.2 165.23,18.92 157.47,18.92 138.71,37.68 C1_BAT2.1 138.57,37.82 135.52,37.82 135.45,37.89 C3.+ 135.31,38.03 134.83,38.52 131.44,38.52 IC4.5 131.37,38.38 131.37,37.82 127.49,33.95 100.41,33.95 90.45,43.9 v90.42,43.96 85.99,43.96 82.2,40.18 TP16.TP 82.06,32.49 81.58,32.01 81.58,25.36 Q2.3 81.44,25.22 78.39,25.22 77.7,24.53 R_CL1.2 77.49,24.53 76.17,24.53 R9.2 | 87.46,59.15 87.46,58.25 87.19,57.97 U3.2 | 87.46,59.15 87.46,60.05 R2-PINH1.2 87.39,60.19 86.56,61.02 86.56,62.34 86.77,62.55 87.74,62.55 88.5,61.78 89.33,61.78 D7.2 | v90.67,58.35 91.19,58.35 R1-PINH1.2 | 87.46,59.15 v87.81,59.15 | U1.8 48.54,47.52 48.54,46.34 U1.7 48.41,46.27 v47.09,46.27 | 41.55,44.26 41.55,38.93 40.93,38.31 39.75,38.31 38.92,39.14 38.64,39.14 R5.2 | 41.55,44.26 40.79,45.03 U1.3 | v41.69,44.33 41.55,44.26 | R7.2 54.57,29.79 53.12,29.79 R8.2 52.98,29.72 50.34,29.72 R6.2 50.21,29.79 46.12,29.79 | U2.2 9.21,36.51 9.21,36.16 13.3,32.08 19.39,32.08 R1.2 19.53,31.94 21.68,29.79 46.12,29.79 | 45.64,106.5 41.29,106.5 | 46.12,29.79 v43.77,32.14
  Bottom 0.3: v21.68,106.52 v30.19,106.52 | 88.61,58.35 v90.67,58.35 90.44,58.81 90.44,60.74 60.45,90.73 v60.45,106.93 | v87.81,59.15 88.61,58.35 | 88.61,58.35 88.71,58.25 88.64,58.11 88.64,51.4 | 88.64,51.4 88.64,45.75 v90.42,43.96 | v43.77,32.14 41.76,34.15 41.76,44.19 v41.69,44.33 43.63,46.27 v47.09,46.27 47.23,46.34 52.28,51.4 88.64,51.4
32KHZ
  Top 0.15: 88.5,52.85 88.5,57.91 U3.1 | R2-PINH1.1 88.85,60.05 89.96,60.05 91.2,58.81 92.17,58.81 92.31,58.67 92.31,52.23 92.1,52.02 89.3,52.02 88.5,52.82 88.5,52.85 | 88.5,52.85 85.39,49.73 85.39,47.38 78.46,40.45 62.74,40.45 55.88,33.6 54.15,33.6 53.95,33.39 53.95,30.9 53.46,30.41 49.79,30.41 47.58,32.63 18.97,32.63 18.07,33.53 18.07,36.51 U2.9
DN
  Top 0.15: 163.64,53.89 163.84,53.68 164.4,53.68 J2.B7 | 163.64,53.89 163.64,54.44 163.84,54.65 164.4,54.65 J2.A7 | 163.64,53.89 163.57,53.89 159.63,49.95 154.23,49.95 152.77,48.49 151.87,48.49 151.87,48.56 D1.4
DP
  Top 0.15: J2.A6 164.47,54.23 165.02,54.23 165.23,54.44 165.23,54.93 165.02,55.14 164.47,55.14 J2.B6 164.4,55.14 156.64,55.14 150.48,48.97 150.48,47.59 151.52,46.55 151.8,46.55 151.8,46.62 D1.6
EPD_3V3  (via drill 0.3)
  Top 0.3: 83.93,23.7 82.89,22.66 82.48,22.66 80.81,24.32 Q2.2 | 83.93,23.7 83.93,24.32 C7.1 84.07,24.46 84.07,25.08 85.04,26.05 L1.2 | J1.16 86.01,14.76 86.42,14.76 J1.15 86.49,14.9 86.49,16.15 87.95,17.6 89.19,17.6 90.09,18.5 EPD_C5.2 89.75,19.06 89.75,21.55 | 89.75,21.55 89.75,22.1 90.09,22.45 TP17.TP | v87.05,23.63 84.07,23.63 83.93,23.7 | 89.75,21.55 v89.12,21.55
  Bottom 0.3: v89.12,21.55 v87.05,23.63
EPD_3V3_C  (via drill 0.3)
  Top 0.3: Q2.1 79.29,26.19 78.94,25.84 77.56,25.84 R_CL1.1 77.49,25.98 v77.49,39.97 | U2.18 20.64,54.03 20.64,48.21 23.61,45.23 36.42,45.23 41.55,50.36 68.7,50.36 TP13.TP 68.77,50.22 v68.77,48.7
  Bottom 0.3: v68.77,48.7 v77.49,39.97
EPD_BUSY  (via drill 0.3)
  Top 0.15: v89.47,15.94 89.47,14.76 J1.9 | v70.01,50.84 67.8,53.06 65.37,53.06 TP9.TP 65.3,53.13 65.03,53.4 v63.99,53.4 | v11.29,52.92 10.46,53.75 10.46,54.03 U2.26
  Bottom 0.15: v89.47,15.94 86.56,18.85 86.56,39.55 87.12,40.11 87.12,45.92 82.2,50.84 v70.01,50.84 | v11.29,52.92 19.46,52.92 19.94,53.4 v63.99,53.4
EPD_CS  (via drill 0.3)
  Top 0.15: v87.6,15.52 87.95,15.18 87.95,14.76 J1.12 | v77.41,20.9 77.21,21.09 77.21,21.69 D6.2 77.14,21.76 75.41,23.49 75.41,24.94 76.11,25.64 76.11,25.77 R9.1 | v49.24,33.11 23.75,33.11 20.64,36.23 20.64,36.51 U2.11 | v66.06,41.22 72.16,47.31 TP10.TP
  Bottom 0.15: v87.6,15.52 87.25,15.52 87.24,15.51 86.64,15.51 85.29,16.87 81.44,16.87 v77.41,20.9 77.41,20.56 76.38,19.54 66.41,19.54 56.23,29.73 | v49.24,33.11 52.84,33.11 56.23,29.73 | v66.06,41.22 56.23,31.38 56.23,29.73
EPD_DC  (via drill 0.3)
  Top 0.15: v88.22,15.52 88.43,15.32 88.43,14.76 J1.11 | v72.44,21.48 51.04,21.48 47.92,24.6 TP11.TP 47.85,24.66 v24.58,24.66 | v16.62,32.63 13.02,36.23 13.02,36.51 U2.5
  Bottom 0.15: v88.22,15.52 83.86,19.89 80.26,19.89 78.67,21.48 v72.44,21.48 | v24.58,24.66 v16.62,32.63
EPD_RST  (via drill 0.3)
  Top 0.15: v88.99,17.05 88.99,14.76 J1.10 | v82.82,50.84 70.64,50.84 65.09,56.38 61.98,56.38 TP12.TP 61.91,56.38 61.22,55.69 v60.8,55.69 | v18.21,55.69 16.83,54.3 16.83,54.1 U2.21
  Bottom 0.15: v88.99,17.05 88.99,20.79 89.61,21.41 89.61,44.06 v82.82,50.84 | v60.8,55.69 v18.21,55.69
FLASH_CS  (via drill 0.3)
  Top 0.15: 39.75,40.52 40.3,40.52 D9.2 | 39.75,40.52 38.64,40.52 R5.1 38.57,40.45 38.23,40.11 v37.81,40.11 | 39.75,40.52 39.75,46.69 40.58,47.52 40.72,47.52 U1.1 | v36.42,38.72 23.82,38.72 21.88,36.78 21.88,36.58 U2.12
  Bottom 0.15: v37.81,40.11 v36.42,38.72
GDR
  Top 0.15: 68.63,14.76 67.52,14.76 66.83,14.07 66.83,11.3 66.97,11.16 89.75,11.16 92.93,14.35 92.93,14.69 J1.2 | 68.63,14.76 69.25,14.14 R4.2 | Q3.1 69.67,16.63 69.67,15.87 68.63,14.83 68.63,14.76
GND  (via drill 0.3)
  Top 0.15: RESET_BUTTON.2 50.76,108.04 51.66,108.94 52.42,108.94 C5.2 52.49,108.94 59.49,108.94 60.18,108.25 61.15,108.25 61.35,108.04 61.35,107.34 61.49,107.21 | C10.2 67.8,108.94 67.8,108.73 68.49,108.04 68.49,107.28 68.28,107.07 66.76,107.07 65.86,107.97 CHANGE_BUTTON.2 65.79,107.97 65.03,107.21 61.49,107.21 | TP5.TP 58.72,80.9 58.72,92.68 53.28,98.13 53.28,99 | 3.08,94.44 2.29,95.23 2.29,95.58 J4.G4 | 3.08,94.44 4.71,92.81 4.85,92.81 J4.P6 | 12.95,99.11 15.44,99.11 16.07,98.49 D8.1 | 12.95,99.11 12.26,99.11 C9.2 | D8.1 16.14,98.42 25.69,107.97 BOOT_BUTTON.2 25.83,108.04 26.45,108.66 27.35,108.66 C6.2 27.42,108.66 36.7,99.39 47.71,99.39 IC1.3 47.78,99.39 49.51,99.39 50.07,99.94 51.94,99.94 C_DELAY.2 52.32,99.96 53.28,99 | 3.08,94.44 9.7,101.05 12.74,101.05 12.95,100.84 12.95,99.11 | D8.1 16.14,98.35 16.34,98.14 16.34,93.02 15.51,92.18 15.51,91.22 J4.G2 15.51,91.14 16.34,90.31 16.34,87.34 15.51,86.51 15.51,85.47 J4.G1 15.44,85.4 12.53,82.49 1.25,82.49 J4.G3 0.48,81.71 0.48,57.97 3.74,54.72 6.51,54.72 6.92,54.3 6.92,38.86 7.96,37.82 v7.96,37.75 7.96,36.58 U2.1 | C1_BAT1.2 125.69,34.78 125.69,35.05 R1_PWRUSB.1 124.23,36.58 125.62,37.96 125.97,37.96 130.54,42.53 v130.54,44.12 131.51,44.12 R2_BAT.1 131.57,44.12 132.61,44.12 135.18,46.69 | 135.18,46.69 135.18,47.45 134.62,48 MCP73831.2 | v128.53,46.13 128.53,47.24 C1_BAT.2 | 137.25,40.59 132.41,40.59 129.43,37.62 128.6,37.62 IC4.2 | 140.37,45.65 140.37,43.71 145.29,43.71 150.34,38.65 156.5,38.65 156.64,38.79 156.64,43.57 | 135.18,46.69 137.32,46.69 138.36,45.65 140.37,45.65 | J2.B12 164.4,51.33 164.4,51.12 J2.A1 164.47,51.05 164.47,50.91
  Top 0.15: 164.47,50.91 164.47,49.8 164.95,49.32 J2.MP3 | J2.MP1 168.9,49.32 165.02,49.32 J2.MP3 | 156.64,43.57 158.17,43.57 164.4,49.8 J2.MP3 | 158.51,57.42 164.4,57.42 J2.B1 164.4,57.49 164.4,57.77 J2.A12 164.47,57.84 164.95,58.32 | 164.95,58.32 164.95,59.5 J2.MP4 165.02,59.57 168.9,59.57 J2.MP2 | 164.47,50.91 165.78,50.91 166.13,51.26 166.13,57.56 165.37,58.32 164.95,58.32 | U2.29_7 14.89,42.6 14.89,43.78 U2.29_8 14.89,43.85 14.89,45.03 U2.29_9 14.82,45.09 13.64,45.09 U2.29_6 13.57,45.09 12.4,45.09 U2.29_3 12.4,45.16 7.96,49.59 7.96,54.03 U2.28 | U2.29_1 12.4,42.6 12.4,43.78 U2.29_2 12.46,43.78 13.57,43.78 U2.29_5 | U2.29_1 12.46,42.6 13.57,42.6 U2.29_4 13.64,42.6 14.82,42.6 U2.29_7 | v11.98,41.77 11.98,42.19 12.33,42.53 U2.29_1 | 37.95,39.62 37.95,38.79 38.85,37.89 47.51,37.89 50.07,35.33 50.07,34.36 D10.1 50.14,34.29 v50.9,34.29 | 37.95,39.62 38.09,39.76 39.68,39.76 40.3,39.14 D9.1 40.37,39.14 41.06,39.83 41.06,41.15 40.79,41.42 40.79,43.71 U1.4 40.72,43.78 40.03,44.47 40.03,46.55 40.23,46.76 41.27,46.76 42.31,45.72 44.6,45.72 U1.9 | 37.95,39.62 37.67,39.62 34.69,42.6 14.96,42.6 U2.29_7 | 91.2,18.92 91.2,17.88 90.03,16.7 90.03,14.76 J1.8 89.96,14.69 89.96,14.35 89.06,13.45 86.42,13.45 85.52,14.35 J1.17 85.45,14.69 85.45,14.35 83.38,12.27 81.02,12.27 J1.MP2 80.95,12.27 78.81,12.27 74.72,16.36 R2.1 74.65,16.43 74.65,16.63 73.06,18.23 72.85,18.23 72.71,18.36 | 91.2,18.92 90.58,19.54 EPD_C5.1 | 91.2,18.92 91.27,18.92 91.83,19.47 92.31,19.47 EPD_C2.1 92.38,19.54 93.56,19.54 93.76,19.75 EPD_C1.1 | EPD_C8.1 85.11,19.61 86.84,19.61 EPD_C7.1 86.91,19.61 88.64,19.61 EPD_C6.1 88.64,19.68 88.64,22.8 89.61,23.77 93.83,23.77
  Top 0.15: J1.MP1 94.53,12.27 94.53,17.53 94.73,17.74 94.73,18.85 94.11,19.47 EPD_C1.1 | 93.83,23.77 93.83,19.75 94.04,19.54 EPD_C1.1 | 93.83,23.77 93.83,26.54 95.08,27.78 95.08,30 D3.1 | 93.97,48.21 92.31,46.55 87.32,46.55 C8.2 87.32,46.48 v86.63,45.79 | U3.13 84.62,48.63 v84.62,47.24 84.55,47.24 78.05,40.73 62.6,40.73 56.23,34.36 54.71,34.36 D11.1 54.64,34.36 D12.1 52.08,34.36 v51.84,34.13 | 82.68,19.61 83.24,19.61 EPD_C9.1 | 82.68,19.61 81.44,19.61 EPD_C10.1 81.37,19.68 81.02,20.03 | v82.68,23.21 82.68,24.32 C7.2 | 82.68,19.61 v82.68,20.37 | 81.02,20.03 79.36,21.69 78.74,21.69 D6.1 | 67.93,13.45 67.93,12.41 67.73,12.2 SJ1.1 | 67.93,13.45 67.93,14.07 R4.1 | 72.71,18.36 72.71,19.47 73.34,20.09 EPD_C11.1 73.41,20.16 74.65,20.16 EPD_C12.1 74.72,20.16 74.86,20.03 81.02,20.03 | 67.93,13.45 69.73,13.45 70.08,13.79 70.08,16.01 70.5,16.43 70.5,17.33 71.53,18.36 72.71,18.36 | C2.2 155.47,5.28 156.57,5.28 C1.2 156.64,5.28 157.34,5.97 159.55,5.97 159.69,6.11 159.69,7.21 158.03,8.88 158.03,8.95 | 158.03,8.95 157.47,8.95 156.99,9.43 156.99,9.64 SENSOR2.7 156.92,9.71 156.92,10.75 156.75,10.92 | 158.03,8.95 158.51,9.43 158.51,9.64 SENSOR2.5 | 156.75,10.92 156.23,11.44 156.23,12.55 SENSOR2.1 | 136.77,36.44 138.57,36.44 C1_BAT2.2 138.64,36.44 157.13,17.95 157.41,17.95 | 136.77,36.44 135.38,35.05 C3.- 135.31,34.98 | 157.41,17.95 165.23,17.95 J3.1 | 127.28,21.34 TP4.TP | v156.64,10.82 156.75,10.92 | v157.41,17.88 157.41,17.95 | 127.28,26.95 127.21,26.95 | v136.77,36.51 136.77,36.44 | 140.37,45.65 140.37,48.39 140.44,48.42 140.44,50.29 U4.4 140.44,50.36 140.78,50.36 141.34,50.91 141.34,51.05 U4.9
  Top 0.15: U4.9 141.34,51.12 141.34,51.26 140.78,51.81 140.44,51.81 U4.1 140.37,51.81 140.02,51.81 139.33,51.12 137.18,51.12 C2_BAT.2 | U4.6 142.38,50.91 141.41,50.91 U4.9 | 53.28,99 61.49,107.21 | 156.64,43.57 155.81,43.57 155.58,43.35 | v156.5,51.26 157.13,50.63 C5_USB.2 | v153.67,45.51 153.67,45.58 153.8,45.58 153.8,45.23 153.67,45.23 153.67,45.44 153.6,45.51 153.53,45.51 153.53,47.01
  Bottom 0.15: v128.53,46.13 v130.54,44.12 130.54,42.74 v136.77,36.51 | v11.98,41.77 v7.96,37.75 | v84.62,47.24 85.18,47.24 v86.63,45.79 86.63,40.04 82.68,36.09 v82.68,23.21 v82.68,20.37 | v156.64,10.82 157.41,11.58 v157.41,17.88 | v50.9,34.29 51.68,34.29 v51.84,34.13 | v156.5,51.26 156.16,51.26 153.67,48.76 153.67,48.7 153.87,48.49 153.8,48.42 153.8,48.28 153.39,47.86 153.32,47.93 153.18,47.93 153.04,48.07 152.9,48.07 152.9,48.14 152.84,48.14 152.84,47.03 153.94,45.92 153.94,45.86 153.74,45.65 153.8,45.58 153.8,45.44 153.94,45.3 153.94,45.16 154.01,45.16 154.01,44.54 153.94,44.54 153.94,44.75 153.67,45.03 v153.67,45.51
  pour Top: 6.56,36.26 6.54,36.24 6.52,36.22 0.08,36.22 0.08,0.08 78.32,0.08 78.32,10.12 78.34,10.14 78.36,10.16 78.38,10.18 96.62,10.18 96.64,10.16 96.66,10.14 96.68,10.12 96.68,0.18 170.12,0.18 170.12,67.22 92.18,67.22 92.16,67.24 92.14,67.26 92.12,67.28 92.12,111.22 68.28,111.22 68.28,110.28 68.26,110.26 68.24,110.24 68.22,110.22 20.98,110.22 20.96,110.24 20.94,110.26 20.92,110.28 20.92,111.22 0.08,111.22 0.08,54.38 6.52,54.38 6.54,54.36 6.56,54.34 6.58,54.32 6.58,36.28
  pour Bottom: 6.46,36.26 6.44,36.24 6.42,36.22 0.08,36.22 0.08,0.08 78.32,0.18 78.32,10.12 78.34,10.14 78.36,10.16 78.38,10.18 96.62,10.18 96.64,10.16 96.66,10.14 96.68,10.12 96.68,0.18 170.12,0.18 170.12,67.22 92.18,67.22 92.16,67.24 92.14,67.26 92.12,67.28 92.12,111.22 68.28,111.22 68.28,110.28 68.26,110.26 68.24,110.24 68.22,110.22 20.98,110.22 20.96,110.24 20.94,110.26 20.92,110.28 20.92,111.22 0.08,111.22 0.08,54.38 6.42,54.38 6.44,54.36 6.46,54.34 6.48,54.32 6.48,36.28
  pour Top: 56.78,31.48 56.76,31.46 56.41,31.1 67.73,19.78 79.27,19.78 81.12,21.63 81.12,37.57 76.77,41.92 56.78,41.92
  pour Top: 8.88,51.18 8.86,51.16 7.78,50.07 7.78,41.73 8.93,40.58 29.17,40.58 33.42,44.83 33.42,70.97 31.47,72.92 1.13,72.92 0.58,72.37 0.58,55.88 0.86,56.16 0.88,56.18 5.92,56.18 5.94,56.16 8.86,53.24 8.88,53.22
  pour Top: 8.85,41.74 8.84,41.74 8.82,41.72 8.78,41.72 8.76,41.74 8.7,41.79 8.68,41.77 8.68,39.03 9.73,37.98 14.52,37.98 14.52,38.72 14.54,38.74 17.02,41.22 9.38,41.22 9.36,41.24
  pour Top: 2.28,100.57 2.28,87.98 12.12,87.98 12.14,87.96 12.92,87.18 12.92,97.92 12.94,97.94 16.72,101.72 4.18,101.72 4.16,101.74 3.8,102.09
  pour Top: 54.02,102.07 48.87,107.22 40.78,107.22 40.76,107.24 40.6,107.39 38.68,105.47 38.68,99.13 40.53,97.28 54.02,97.28
  pour Top: 9.43,25.18 54.02,25.18 53.04,26.16 53.02,26.18 53.02,37.77 51.67,39.12 8.93,39.12 6.18,36.37 6.18,28.43
  pour Top: 99.82,49.13 99.82,63.82 82.28,63.82 82.26,63.84 81.45,64.64 81.45,64.64 81.45,64.64 80.28,63.47 80.28,45.83 80.93,45.18 95.87,45.18
  pour Top: 166.82,37.32 166.74,37.24 166.72,37.22 144.48,37.22 144.48,3.23 146.03,1.68 168.72,1.68 166.84,3.56 166.82,3.58
  pour Top: 83.14,20.34 83.52,20.72 70.63,20.72 63.31,13.4 63.53,13.18 83.12,13.18 83.12,20.32
  pour Bottom: 11.68,35.93 15.13,32.48 22.42,32.48 22.44,32.46 43.13,11.78 92.87,11.78 94.72,13.63 94.72,35.72 94.74,35.74 94.92,35.93 94.92,52.92 83.18,52.92 83.16,52.94 81.28,54.82 81.28,27.23 85.36,23.14 85.38,23.12 85.38,23.08 85.36,23.06 85.34,23.04 85.32,23.02 85.28,23.02 85.26,23.04 84.37,23.92 69.88,23.92 69.86,23.94 46.17,47.62 31.68,47.62 31.66,47.64 12.74,66.56 12.72,66.58 12.72,93.13 12.72,93.12 2.28,93.12 2.28,93.08 2.26,93.06 1.98,92.77 1.98,57.98 2.02,57.98 2.04,57.96 4.83,55.18 5.62,55.18 5.64,55.16 6.96,53.84 6.98,53.82 6.98,53.03 7.26,52.74 7.28,52.72 7.28,47.63 11.66,43.24 11.68,43.22
  pour Bottom: 146.68,34.03 147.93,32.78 150.92,32.78 150.94,32.76 152.72,30.98 152.72,33.52 152.74,33.54 154.46,35.26 154.48,35.28 158.27,35.28 166.92,43.93 166.92,56.42 166.94,56.44 167.32,56.82 161.28,56.82 161.26,56.84 160.87,57.22 157.43,57.22 146.68,46.47
  pour Bottom: 148.03,32.08 153.77,32.08 156.12,34.43 156.12,41.87 155.27,42.72 149.03,42.72 147.78,41.47 147.78,32.33
  pour Bottom: 2.26,91.84 2.28,91.82 2.28,56.23 3.93,54.58 10.57,54.58 12.92,56.93 12.92,92.67 12.37,93.22 0.88,93.22
  pour Bottom: 90.82,50.08 90.84,50.06 90.92,49.98 90.92,56.87 90.17,57.62 18.28,57.62 18.26,57.64 16.87,59.02 16.08,59.02 16.56,58.54 16.58,58.52 16.58,50.08
GPIO8
  Top 0.15: R1.1 19.39,33.32 19.39,36.51 U2.10
I2C_PW  (via drill 0.3)
  Top 0.15: R2-PINH.2 159,6.59 157.89,6.59 R1-PINH.2 157.82,6.59 156.64,6.59 C1.1 156.57,6.59 156.16,6.59 | 156.16,6.59 155.47,6.59 C2.1 | 156.16,6.59 156.16,9.64 SENSOR2.8 156.09,9.71 156.09,11.16 155.67,11.58 155.67,13.17 155.88,13.38 156.44,13.38 156.92,12.89 156.92,12.62 SENSOR2.2 156.99,12.55 156.99,11.71 | 156.99,11.71 156.99,11.09 157.75,10.33 157.75,9.71 SENSOR2.6 | v22.92,46.69 21.88,47.72 21.88,54.03 U2.17 | v156.92,11.71 156.99,11.71
  Bottom 0.15: v22.92,46.69 22.92,44.96 17.11,39.14 17.11,35.26 40.65,11.71 v156.92,11.71
INT_RTC  (via drill 0.3)
  Top 0.15: v89.89,60.54 90.86,59.57 91.55,59.57 R1-PINH1.1 | v86.91,59.36 85.94,58.39 85.94,57.97 U3.3 85.87,58.39 84.48,59.78 57.82,59.78 TP15.TP 57.76,59.78 50.41,59.78 36.42,45.79 v24.17,45.79 | v18.07,38.72 16.83,37.48 16.83,36.58 U2.8
  Bottom 0.15: v89.89,60.54 88.09,60.54 v86.91,59.36 | v18.07,38.72 18.07,39.69 v24.17,45.79
IO/BOOT  (via drill 0.3)
  Top 0.15: R_BOOT.1 20.64,108.87 21.61,108.87 22.23,109.5 BOOT_BUTTON.4 22.3,109.43 22.4,109.43 v24.03,109.43 25.69,109.43 BOOT_BUTTON.3 | C6.1 27.35,107.42 26.73,107.42 v26.38,107.07 26.38,107 24.45,105.06 24.45,54.1 U2.15
  Bottom 0.15: v24.03,109.43 v26.38,107.07
IO/CHANGE  (via drill 0.3)
  Top 0.15: 62.38,109.38 62.33,109.43 CHANGE_BUTTON.4 62.26,109.5 61.77,109.01 60.66,109.01 R_CHANGE.1 60.59,109.01 60.32,109.29 v59.76,109.29 | 62.38,109.38 63.02,108.73 66.69,108.73 67.73,107.7 C10.1 | v14.27,63.79 14.27,54.1 U2.23 | CHANGE_BUTTON.3 62.5,109.5 62.38,109.38
  Bottom 0.15: v59.76,109.29 v14.27,63.79
MISO  (via drill 0.3)
  Top 0.15: R8.1 52.98,31.11 52.98,32.84 D12.2 52.49,32.87 51.41,33.95 51.41,34.4 44.49,41.32 | 44.49,41.32 42.73,43.09 42.73,44.06 40.79,45.99 40.79,46.27 U1.2 | v6.72,92.39 5.26,93.85 5.12,93.85 J4.P7 | 44.49,41.32 46.6,43.43 46.6,47.86 46.4,48.07 39.82,48.07 36.56,44.82 18.14,44.82 9.21,53.75 9.21,54.03 U2.27 9.14,54.1 9.14,55.14 6.92,57.35 1.52,57.35 0.76,58.11 0.76,65.68 6.72,71.64 | v6.72,71.65 9.57,68.79 TP6.TP
  Top 0.152: v6.72,71.65 6.72,71.64
  Bottom 0.15: v6.72,92.39 v6.72,71.65
MOSI  (via drill 0.3)
  Top 0.15: v87.05,15.94 87.05,14.76 J1.14 | 61.84,35.81 61.84,37.13 TP7.TP | 54.64,32.01 54.64,32.84 D11.2 54.71,32.91 55.61,32.91 58.52,35.81 61.84,35.81 | 54.64,32.01 54.64,31.11 R7.1 | v50.07,36.88 49.88,37.08 U1.5 | v54.57,32.01 54.64,32.01 | 17.94,39.21 15.58,36.85 15.58,36.58 U2.7 | 17.94,39.21 37.12,39.21 40.44,35.88 v48.89,35.88 | v4.36,88.72 5.05,89.41 J4.P3 | v17.24,39.97 17.94,39.28 17.94,39.21 | v79.01,20.51 78.03,20.51 77.98,20.47 77.19,20.47 61.84,35.81
  Bottom 0.15: v54.57,32.01 50.07,36.51 v50.07,36.88 49.89,36.88 v48.89,35.88 | v4.36,88.72 4.36,57.28 17.24,44.4 v17.24,39.97 | v87.05,15.94 86.61,15.94 85.4,17.14 82.38,17.14 v79.01,20.51
N$1
  Top 0.15: J2.A5 164.4,53.13 163.72,53.13 158.05,47.45 158.05,47.07 155.8,44.82 154.98,44.82 154.98,44.75 R2-USB1.2
N$4  (via drill 0.3)
  Top 0.15: v154.15,42.67 153.56,43.26 153.6,43.29 153.6,43.57 R2-USB.1 | v165.37,55.76 165.02,56.11 164.47,56.11 J2.B5
  Bottom 0.15: v154.15,42.67 154.5,42.67 165.37,53.54 v165.37,55.76
N$6
  Top 0.15: 126.94,34.98 126.94,34.78 C1_BAT1.1 126.94,34.98 | 126.94,34.98 125.48,36.44 D2.1 | 126.94,34.98 128.53,36.58 IC4.3 128.46,36.58 127.91,37.13 127.91,37.96 128.04,38.1 128.11,38.1 128.53,38.52 IC4.1 128.6,38.59 130.88,40.87 135.66,40.87 138.99,44.19 139.75,44.19 Q1.2
N$7
  Top 0.15: R2_BAT.2 131.57,45.44 131.57,46.89 131.71,47.03 MCP73831.5
N$8
  Top 0.15: J1.5 91.55,14.76 91.55,17.39 92.31,18.16 EPD_C2.2
N$9
  Top 0.15: J1.4 92.03,14.76 92.03,16.15 94.04,18.16 EPD_C1.2
N$10
  Top 0.15: CHG_LED.C 128.46,48.9 126.17,48.9 R1_BAT.1
N$11
  Top 0.15: R1_BAT.2 124.86,48.9 125.07,48.9 126.03,47.93 133.24,47.93 134.07,47.1 134.28,47.1 MCP73831.1
N$12
  Top 0.15: J1.24 81.92,14.76 78.81,14.76 74.72,18.85 EPD_C12.2
N$13
  Top 0.15: IC1.5 50.55,101.26 51.94,101.26 C_DELAY.1
N$15
  Top 0.15: J1.22 82.96,14.76 82.96,16.77 81.44,18.29 EPD_C10.2
N$16
  Top 0.15: C4.1 96.74,31.8 93.35,31.8 91.62,30.07 D3.2 91.55,30 91.55,26.54 D4.1
N$18
  Top 0.15: J1.20 84,14.76 84,17.26 85.04,18.29 EPD_C8.2
N$19
  Top 0.15: J1.19 84.55,14.76 84.55,15.94 86.84,18.23 EPD_C7.2
N$20
  Top 0.15: J1.18 85.04,14.76 85.04,15.25 88.02,18.23 88.64,18.23 EPD_C6.2
N$25
  Top 0.15: D7.1 87.25,61.71 87.25,61.51 88.22,60.54 88.22,59.57 88.57,59.22 88.78,59.22 91.62,56.38 91.62,52.71 R_CAPACITOR.1
PREVGH
  Top 0.15: J1.21 83.45,14.76 83.45,18.16 83.31,18.29 EPD_C9.2 83.31,18.36 83.93,18.99 83.93,19.68 88.02,23.77 88.02,31.24 86.84,32.42 86.84,32.98 D5.1
PREVGL  (via drill 0.3)
  Top 0.15: 82.23,15.35 78.11,19.47 74.03,19.47 73.41,18.85 EPD_C11.2 | 82.23,15.35 82.48,15.11 82.48,14.76 J1.23 | v94.32,20.23 95.01,20.93 95.01,26.47 D4.2 | 82.23,15.35 82.41,15.52 v82.41,16.44
  Bottom 0.15: v94.32,20.23 89.96,15.87 89.96,15.8 89.25,15.1 86.67,15.1 85.48,16.29 82.56,16.29 v82.41,16.44
RESE
  Top 0.15: J1.3 92.45,14.69 92.45,14.35 89.68,11.58 73.13,11.58 71.12,13.59 R3.2 71.47,13.31 73.96,15.8 73.96,16.91 73.82,17.05 72.92,17.05 72.57,16.7 Q3.2
RESE'
  Top 0.15: 70.36,12.27 69.32,12.27 69.25,12.2 SJ1.2 | 70.36,12.27 71.05,12.27 R3.1 | 70.36,12.27 70.36,14 72.71,16.36 73.34,16.36 R2.2
RESET  (via drill 0.3)
  Top 0.15: v48.27,108.46 47.23,109.5 RESET_BUTTON.4 47.16,109.5 | 47.16,109.5 46.67,109.01 45.64,109.01 R_RESET.1 | v51.8,108.32 52.42,107.7 C5.1 | v10.39,42.12 10.39,36.58 U2.3 | IC1.1 47.78,101.27 v47.78,106 | RESET_BUTTON.3 47.16,109.5
  Bottom 0.15: 47.78,106.45 47.78,107.97 v48.27,108.46 48.34,108.46 48.48,108.32 v51.8,108.32 | v10.39,42.12 10.39,50.84 3.88,57.35 3.88,90.18 19.74,106.03 47.3,106.03 47.71,106.45 47.78,106.45 | 47.78,106.45 v47.78,106
RTC_RST  (via drill 0.3)
  Top 0.15: v23.96,55.2 23.2,54.44 23.2,54.1 U2.16 | v82.2,55.2 84.62,57.63 84.62,57.91 U3.4
  Bottom 0.15: v82.2,55.2 v23.96,55.2
RX
  Top 0.15: U2.24 12.95,54.1 12.95,54.3 5.12,62.13 2.01,62.13 TP2.TP
SCK  (via drill 0.3)
  Top 0.15: v87.05,13.93 87.46,14.35 87.46,14.69 J1.13 | v61.38,15.73 59.75,15.05 TP8.TP | R6.1 50.28,31.04 50.28,32.63 50.14,32.77 D10.2 50.14,32.84 v48.41,34.57 | v48.48,44.33 48.48,45.03 U1.6 | v17.59,35.4 15.17,35.4 14.27,36.3 14.27,36.51 U2.6 | v6.23,91.91 6.03,91.7 5.12,91.7 J4.P5
  Bottom 0.15: v87.05,13.93 85.25,15.73 v61.38,15.73 61.29,15.73 45.43,31.59 45.43,31.66 | v48.48,44.33 48.48,36.09 48.41,36.02 v48.41,34.57 48.34,34.57 45.43,31.66 | v17.59,35.4 24.38,35.4 25.14,36.16 34.4,36.16 39.13,36.16 43.63,31.66 45.43,31.66 | v6.23,91.91 6.23,56.8 15.86,47.17 23.41,47.17 25.14,45.44
  Bottom 0.152: 25.14,45.44 34.4,36.18 34.4,36.16
SCL  (via drill 0.3)
  Top 0.15: 159.97,11.16 159.97,5.97 159.28,5.28 159.07,5.28 R2-PINH.1 | 159.97,11.16 158.58,12.55 SENSOR2.4 | v150.34,35.81 165.23,20.93 J3.4 165.3,20.86 165.58,20.86 166.41,20.03 166.41,17.33 160.24,11.16 159.97,11.16 | v23.96,60.19 18.07,54.3 18.07,54.1 U2.20 | v88.71,61.02 91.2,61.02 94.94,57.28 94.94,49.66 | U3.16 88.5,48.7 89.25,49.45 94.77,49.45 94.89,49.57 94.89,49.61 94.94,49.66 | v109.69,46.62 98.06,46.62 95.01,49.66 94.94,49.66 | v149.04,44.88 149.04,44.93 142.72,51.33 142.45,51.33 U4.7
  Bottom 0.15: v150.34,35.81 150.14,36.02 150.14,43.78 v149.04,44.88 130.41,44.88 128.67,46.62 v109.69,46.62 | v23.96,60.19 87.32,60.19 88.16,61.02 v88.71,61.02
SDA  (via drill 0.3)
  Top 0.15: R1-PINH.1 157.82,5.21 157.27,4.65 154.91,4.65 154.77,4.79 154.77,12.69 155.74,13.65 156.99,13.65 157.75,12.89 SENSOR2.3 157.82,12.89 162.25,17.33 165.99,17.33 166.13,17.46 166.13,19.26 165.58,19.82 165.3,19.82 J3.3 165.23,19.89 164.95,19.89 v150.97,33.88 | v20.08,52.92 19.39,53.61 19.39,54.03 U2.19 | v83.79,52.92 v85.87,50.84 | U3.15 87.19,48.7 87.6,49.11 v87.6,50.01 87.67,50.01 88.5,50.84 v89.19,50.84 | v150.97,42.88 150.97,43.57 142.72,51.81 142.45,51.81 U4.8 142.38,51.88 142.03,51.88 141.75,52.16 v141.13,52.16
  Bottom 0.15: v150.97,33.88 v150.97,42.88 | v83.79,52.92 v20.08,52.92 | v85.87,50.84 86.77,50.84 v87.6,50.01 | v89.19,50.84 89.75,51.4 89.82,51.4 90.58,52.16 v141.13,52.16
SRC  (via drill 0.3)
  Top 0.15: 85.11,33.67 84,33.67 83.38,33.04 D5.2 83.31,32.98 v82.2,31.87 | 85.11,33.67 96.12,33.67 97.5,32.28 97.5,31.38 96.81,30.69 96.81,30.55 C4.2 | v70.36,20.03 70.36,18.85 Q3.3 | 85.11,33.67 L1.1
  Bottom 0.15: v82.2,31.87 v70.36,20.03
SS_SD  (via drill 0.3)
  Top 0.15: D8.2 14.54,98.49 11.7,98.49 11.08,99.11 10.39,99.11 R10.1 10.39,99.04 10.39,93.36 5.54,88.51 5.54,88.38 J4.P2 5.54,88.31 v7.2,86.64 | v7.2,56.45 7.2,45.92 11.7,41.42 11.7,36.58 U2.4
  Bottom 0.15: v7.2,86.64 v7.2,56.45
TX
  Top 0.15: U2.25 11.7,54.1 11.7,54.3 7.41,58.6 2.01,58.6 TP1.TP
USB_D+  (via drill 0.3)
  Top 0.15: v154.29,45.58 154.29,46.62 D1.1 | v25.28,35.68 24.45,36.51 U2.14
  Bottom 0.15: v154.29,45.58 154.29,44.4 151.45,41.56 151.45,33.74 131.16,13.45 47.51,13.45 v25.28,35.68
USB_D-  (via drill 0.3)
  Top 0.15: v47.99,33.6 25.83,33.6 23.2,36.23 23.2,36.51 U2.13 | v153.32,48.42 153.94,48.42 153.94,48.49 154.29,48.49 D1.3
  Bottom 0.15: v153.32,48.42 110.87,48.42 94.8,32.35 94.8,20.09 89.47,14.76 86.61,14.76 85.36,16.01 65.58,16.01 v47.99,33.6
VBAT
  Top 0.3: 138.64,48.21 137.12,49.73 C2_BAT.1 136.91,49.73 136.15,48.97 134.34,48.97 MCP73831.3 | 138.64,48.21 TP3.TP 138.78,48.14 138.78,46.41 Q1.3 | U4.2 140.44,51.33 140.44,50.91 U4.3 140.3,50.77 139.88,50.77 138.64,49.53 138.64,48.21
VBUS  (via drill 0.3)
  Top 0.3: 148.61,47.24 149.79,47.24 151.1,45.92 152.56,45.92 | 148.61,47.24 148.54,47.24 | 152.56,45.92 152.77,46.13 152.77,47.03 152.34,47.45 151.8,47.45 D1.5 151.73,47.59 151.31,47.59 150.9,48 150.9,48.89 152.57,50.56 155.81,50.56 C5_USB.1 | PFMF.050.1.2 155.67,40.73 154.91,40.73 152.52,43.12 152.52,44.67 152.56,44.7 152.56,45.92 | 125.41,38.59 125,38.17 123.96,38.17 R1_PWRUSB.2 | 129.77,45.58 129.77,43.02 129.6,42.84 | 129.77,45.58 129.77,47.24 C1_BAT.1 | 129.6,42.84 125.48,38.72 125.41,38.59 | 129.77,45.58 126.94,45.58 124.17,48.35 124.17,49.53 124.37,49.73 129.01,49.73 129.84,48.9 CHG_LED.A 130.05,48.9 131.71,48.9 MCP73831.4 131.85,49.04 133.1,49.04 140.44,56.38 142.31,56.38 TP14.TP 142.74,56.04 142.74,52.97 148.43,47.28 148.54,47.24 | 148.61,47.24 148.61,47.1 C4_USB.1 148.54,47.24 | 125.41,38.59 125.41,38.65 D2.2 125.41,38.59 | v137.25,43.5 137.81,44.06 137.81,44.19 Q1.1 | v129.71,42.74 129.6,42.84
  Bottom 0.3: v137.25,43.5 137.25,36.78 137.32,36.72 137.32,36.3 136.98,35.95 136.49,35.95 v129.71,42.74
VRTC
  Top 0.3: 93,51.47 93,52.64 R_CAPACITOR.2 | 93.97,50.5 93.89,50.58 | 93.89,50.58 93,51.47 | C8.1 86.01,46.55 86.01,48.56 85.94,48.63 U3.14 86.01,48.76 86.01,49.18 88.22,51.4 92.86,51.4 93,51.47 | C10_SUPERCAP.2 93.89,50.58
VUSB  (via drill 0.3)
  Top 0.3: J2.A4 164.4,51.88 164.4,52.16 J2.B9 164.26,52.23 v163.43,52.23 | J2.A9 164.4,56.94 164.4,56.73 J2.B4 164.26,56.66 163.78,56.66 v163.43,56.31 | v152.35,41.84 151.24,40.73 PFMF.050.1.1
  Bottom 0.3: v163.43,56.31 v163.43,52.23 163.29,52.16 162.67,52.16 v152.35,41.84

## Text on the board
tPlace: GND | MISO | RX | INT_RTC | TX | EPD_RST | VBUS | EPD_BUSY | EPD_3V3_C | EPD_CS | VBAT | 3V3 | MOSI | EPD_3V3 | EPD_DC | GND | SCK